# EAGLE board MotorAndLight (EAGLE 8.2.1)
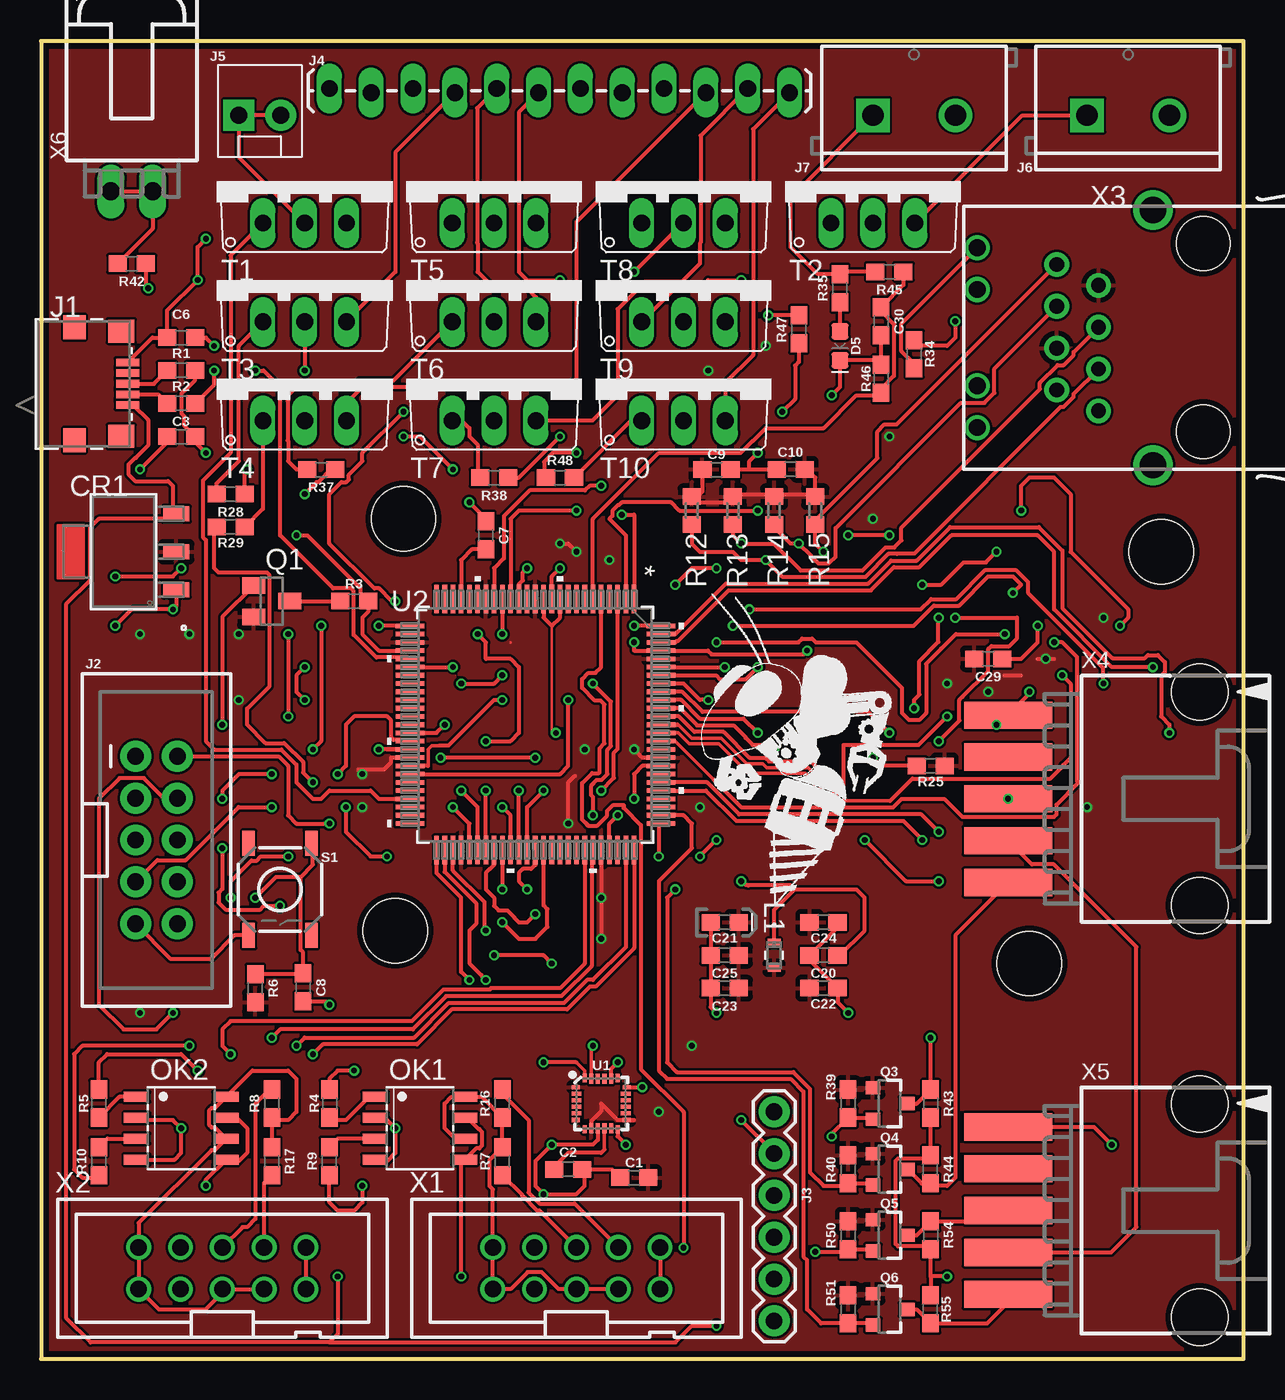
[diagram p0: board, top side]
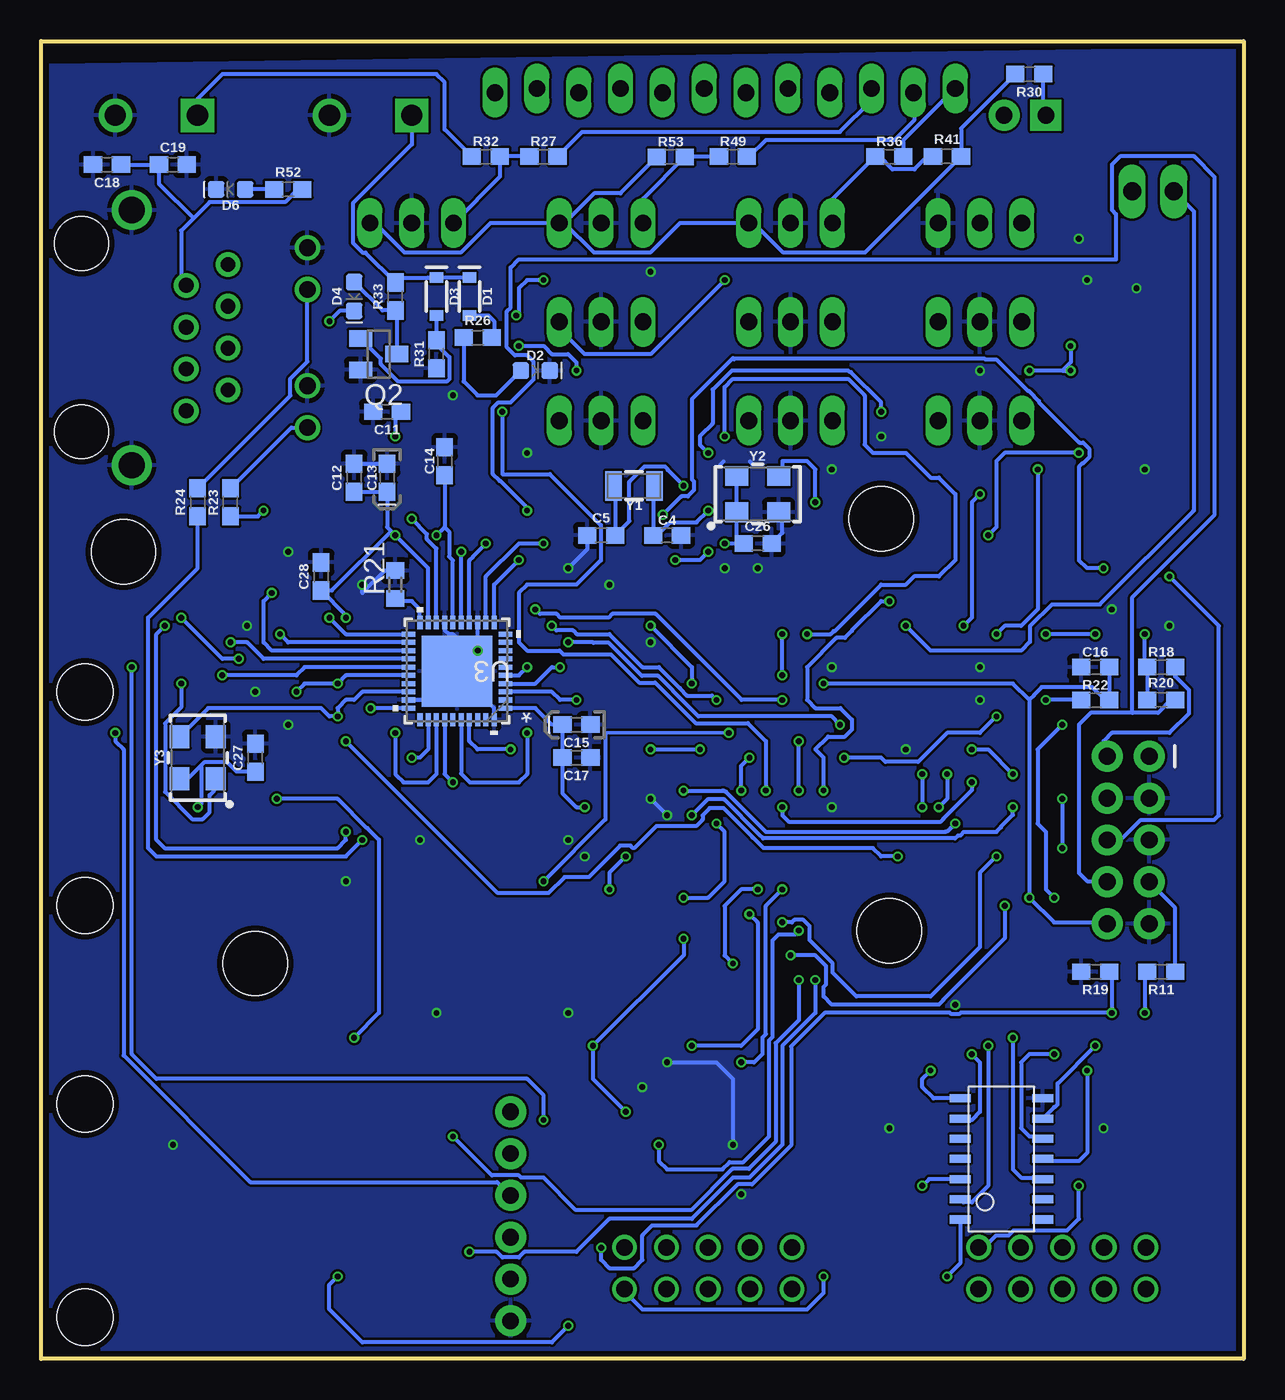
[diagram p1: board, bottom side, seen from below]

Size 73 x 80 mm. Coordinates in mm from the lower left corner, seen from the top.
Outline: 0,0 73,0 73,80 0,80 0,0
Copper layers (1*16): Top 0.018mm / dielectric 1.55mm / Bottom 0.018mm
Design rules "eC_2Layer_PClass6_BaseCopperO18_eCDefault *": minimum track width 0.15mm, minimum drill 0.35mm, track to track 0.15mm, track to pad 0.15mm, pad to pad 0.15mm, via to via 0.15mm, smd to smd 0mil, copper to edge 0.35mm, drill to drill 0.35mm, minimum pad ring 0.175mm, minimum via ring 0.125mm, stop-mask expansion 0mil, vias tented up to drill 0.45mm, thermal gap 0.3mm

## Footprints (pad centres in the part's own frame; a part is rotated, then mirrored left to right if it is on the bottom)
0603 = smd 1.1 x 1: 1 -0.85,0; 2 0.85,0
0603-POLAR = smd 1.1 x 1: + 0.85,0; - -0.85,0
SOT-223 = smd 0.914 x 1.6: 1 -2.3,-3.2; 2 0,-3.2; 3 2.3,-3.2
SOD-323 = smd 0.63 x 0.83: A 1.15,0; C -1.15,0
LED-0603 = smd 1 x 1: A -0.877,0; C 0.877,0
CONN_1981568-1 = smd 0.457 x 1.397: 1 2.6,-0.254; 2 1.95,-0.254; 3 1.3,-0.254; 4 0.65,-0.254; 5 0,-0.254 | smd 1.397 x 1.6: 6 -1.9,-0.635; 7 4.5,-0.635 | smd 1.448 x 1.346: 8 -2.129,-3.48; 9 4.729,-3.48
2X5-SHROUDED = drill 1.016 pad 1.88: 1 -1.27,5.08; 2 1.27,5.08; 3 -1.27,2.54; 4 1.27,2.54; 5 -1.27,0; 6 1.27,0; 7 -1.27,-2.54; 8 1.27,-2.54; 9 -1.27,-5.08; 10 1.27,-5.08
FTDI_BASIC = drill 1.016 pad 1.88: CTS 10.16,0; DTR 0,0; GND 12.7,0; RXI 2.54,0; TXO 5.08,0; VCC 7.62,0
1X12_LOCK_LONGPADS = drill 1.016 long: 1 0,0.127; 2 2.54,-0.127; 3 5.08,0.127; 4 7.62,-0.127; 5 10.16,0.127; 6 12.7,-0.127; 7 15.24,0.127; 8 17.78,-0.127; 9 20.32,0.127; 10 22.86,-0.127; 11 25.4,0.127; 12 27.94,-0.127
MOLEX-1X2 = drill 1.016 pad 1.88 square: 1 0,0 | drill 1.016 pad 1.88: 2 2.54,0
SCREWTERMINAL-5MM-2 = drill 1.3 pad 2.032 square: 1 0,0 | drill 1.3 pad 2.032: 2 5,0
IND_1608 = smd 0.503 x 0.8: 1 -0.752,0; 2 0.752,0
SOIC08-FAIRCHILD = smd 0.61 x 1.52: 1 -1.905,-2.723; 2 -0.635,-2.723; 3 0.635,-2.723; 4 1.905,-2.723; 5 1.905,2.723; 6 0.635,2.723; 7 -0.635,2.723; 8 -1.905,2.723
SOT23 = smd 1 x 1.4: 1 -0.95,-1.1; 2 0.95,-1.1; 3 0,1.1
SOT23-3 = smd 0.8 x 0.9: 1 -0.95,-1; 2 0.95,-1; 3 0,1.1
R0603 = smd 1 x 1.1: 1 -0.85,0; 2 0.85,0
TACTILE_SWITCH_SMD_5.2MM = smd 1.524 x 0.762: 1 -2.794,1.905; 2 2.794,1.905; 3 -2.794,-1.905; 4 2.794,-1.905
TO220V = drill 1.016 long: 1 -2.54,-2.54; 2 0,-2.54; 3 2.54,-2.54
QFN24-3X3 = smd 0.495 x 0.25: 1 -1.552,1; 6 -1.552,-1; 13 1.552,-1; 18 1.552,1 | smd 0.6 x 0.25: 2 -1.5,0.6; 3 -1.5,0.2; 4 -1.5,-0.2; 5 -1.5,-0.6; 14 1.5,-0.6; 15 1.5,-0.2; 16 1.5,0.2; 17 1.5,0.6 | smd 0.25 x 0.495: 7 -1,-1.552; 12 1,-1.552; 19 1,1.552; 24 -1,1.552 | smd 0.25 x 0.6: 8 -0.6,-1.5; 9 -0.2,-1.5; 10 0.2,-1.5; 11 0.6,-1.5; 20 0.6,1.5; 21 0.2,1.5; 22 -0.2,1.5; 23 -0.6,1.5
SOT407-1 = smd 1.727 x 0.279: 1 -7.62,6; 2 -7.62,5.5; 3 -7.62,5; 4 -7.62,4.5; 5 -7.62,4; 6 -7.62,3.5; 7 -7.62,3; 8 -7.62,2.5; 9 -7.62,2; 10 -7.62,1.5; 11 -7.62,1; 12 -7.62,0.5; 13 -7.62,0; 14 -7.62,-0.5; 15 -7.62,-1; 16 -7.62,-1.5; 17 -7.62,-2; 18 -7.62,-2.5; 19 -7.62,-3; 20 -7.62,-3.5; 21 -7.62,-4; 22 -7.62,-4.5; 23 -7.62,-5; 24 -7.62,-5.5; 25 -7.62,-6; 51 7.62,-6; 52 7.62,-5.5; 53 7.62,-5; 54 7.62,-4.5; 55 7.62,-4; 56 7.62,-3.5; 57 7.62,-3; 58 7.62,-2.5; 59 7.62,-2; 60 7.62,-1.5; 61 7.62,-1; 62 7.62,-0.5; 63 7.62,0; 64 7.62,0.5; 65 7.62,1; 66 7.62,1.5; 67 7.62,2; 68 7.62,2.5; 69 7.62,3; 70 7.62,3.5; 71 7.62,4; 72 7.62,4.5; 73 7.62,5; 74 7.62,5.5; 75 7.62,6 | smd 0.279 x 1.727: 26 -6,-7.62; 27 -5.5,-7.62; 28 -5,-7.62; 29 -4.5,-7.62; 30 -4,-7.62; 31 -3.5,-7.62; 32 -3,-7.62; 33 -2.5,-7.62; 34 -2,-7.62; 35 -1.5,-7.62; 36 -1,-7.62; 37 -0.5,-7.62; 38 0,-7.62; 39 0.5,-7.62; 40 1,-7.62; 41 1.5,-7.62; 42 2,-7.62; 43 2.5,-7.62; 44 3,-7.62; 45 3.5,-7.62; 46 4,-7.62; 47 4.5,-7.62; 48 5,-7.62; 49 5.5,-7.62; 50 6,-7.62; 76 6,7.62; 77 5.5,7.62; 78 5,7.62; 79 4.5,7.62; 80 4,7.62; 81 3.5,7.62; 82 3,7.62; 83 2.5,7.62; 84 2,7.62; 85 1.5,7.62; 86 1,7.62; 87 0.5,7.62; 88 0,7.62; 89 -0.5,7.62; 90 -1,7.62; 91 -1.5,7.62; 92 -2,7.62; 93 -2.5,7.62; 94 -3,7.62; 95 -3.5,7.62; 96 -4,7.62; 97 -4.5,7.62; 98 -5,7.62; 99 -5.5,7.62; 100 -6,7.62
SQA40B = smd 0.813 x 0.305: 1 -2.946,2.25; 2 -2.946,1.75; 3 -2.946,1.25; 4 -2.946,0.75; 5 -2.946,0.25; 6 -2.946,-0.25; 7 -2.946,-0.75; 8 -2.946,-1.25; 9 -2.946,-1.75; 10 -2.946,-2.25; 21 2.946,-2.25; 22 2.946,-1.75; 23 2.946,-1.25; 24 2.946,-0.75; 25 2.946,-0.25; 26 2.946,0.25; 27 2.946,0.75; 28 2.946,1.25; 29 2.946,1.75; 30 2.946,2.25 | smd 0.305 x 0.813: 11 -2.25,-2.946; 12 -1.75,-2.946; 13 -1.25,-2.946; 14 -0.75,-2.946; 15 -0.25,-2.946; 16 0.25,-2.946; 17 0.75,-2.946; 18 1.25,-2.946; 19 1.75,-2.946; 20 2.25,-2.946; 31 2.25,2.946; 32 1.75,2.946; 33 1.25,2.946; 34 0.75,2.946; 35 0.25,2.946; 36 -0.25,2.946; 37 -0.75,2.946; 38 -1.25,2.946; 39 -1.75,2.946; 40 -2.25,2.946 | smd 4.3 x 4.3: 41 0,0
STANDOFF-HOLE = hole 3.9: 0,0
74HC14 = smd 1.27 x 0.49: 1A -0.5,8.05; 1Y -0.5,6.825; 2A -0.5,5.6; 2Y -0.5,4.375; 3A -0.5,3.15; 3Y -0.5,1.925; 4A 4.5,6.825; 4Y 4.5,5.6; 5A 4.5,4.375; 5Y 4.5,3.15; 6A 4.5,1.925; 6Y 4.5,0.7; GND -0.5,0.7; VCC 4.5,8.05
PAK100/2500-10 = drill 1 pad 1.422: 1 -5.08,-1.27; 2 -5.08,1.27; 3 -2.54,-1.27; 4 -2.54,1.27; 5 0,-1.27; 6 0,1.27; 7 2.54,-1.27; 8 2.54,1.27; 9 5.08,-1.27; 10 5.08,1.27
SI-50170 = drill 0.9 pad 1.5: 1 4.445,5.842; 2 3.175,3.302; 3 1.905,5.842; 4 0.635,3.302; 5 -0.635,5.842; 6 -1.905,3.302; 7 -3.175,5.842; 8 -4.445,3.302 | drill 1.016 pad 1.5: A1 -5.461,10.668; A2 2.921,10.668; C1 -2.921,10.668; C2 5.461,10.668 | drill 1.6 pad 2.2: S1 -7.747,0; S2 7.747,0 | hole 3.251: -5.715,-3.048; 5.715,-3.048
15-91-05 = smd 1.651 x 5.334: 1 -5.08,-10.795; 2 -2.54,-10.795; 3 0,-10.795; 4 2.54,-10.795; 5 5.08,-10.795 | hole 3.404: -6.477,0.838; 6.477,0.838
70553-02 = drill 1.092 long: 1 -1.27,-7.62; 2 1.27,-7.62
CRYSTAL-SMD-3.2X1.5MM = smd 1 x 1.8: P$1 -1.25,0; P$2 1.25,0
OSCILLATOR-SMD-5X3.2 = smd 1.397 x 1.194: 1 -1.27,-1.1; 2 1.27,-1.1; 3 1.27,1.1; 4 -1.27,1.1

## Placement (x,y rotation side)
C1  0.1uF  [0603]  36,11 180 top
C2  0.1uF  [0603]  32,11.5 0 top
C3  18pF  [0603]  8.5,56 180 top
C4  18pF  [0603]  35,50 180 bottom
C5  18pF  [0603]  39,50 0 bottom
C6  18pF  [0603]  8.5,62 180 top
C7  100pF  [0603]  27,50 270 top
C8  1000pF  [0603]  15.9,22.55 270 top
C9  0.1uF  [0603]  41,54 180 top
C10  0.1uF  [0603]  45.5,54 0 top
C11  0.1uF  [0603]  52,57.5 180 bottom
C12  0.1uF  [0603]  54,53.5 90 bottom
C13  10uF  [0603-POLAR]  52,53.5 270 bottom
C14  0.1uF  [0603]  48.5,54.5 270 bottom
C15  10uF  [0603-POLAR]  40.5,38.5 180 bottom
C16  0.1uF  [0603]  9,42 180 bottom
C17  0.1uF  [0603]  40.5,36.5 180 bottom
C18  0.1uF  [0603]  69,72.5 180 bottom
C19  0.1uF  [0603]  65,72.5 0 bottom
C20  0.1uF  [0603]  47.5,24.5 180 top
C21  10uF  [0603-POLAR]  41.5,26.5 0 top
C22  0.1uF  [0603]  47.5,22.5 0 top
C23  0.1uF  [0603]  41.5,22.5 180 top
C24  0.1uF  [0603]  47.5,26.5 0 top
C25  0.1uF  [0603]  41.5,24.5 180 top
C26  0.1uF  [0603]  29.5,49.5 0 bottom
C27  0.1uF  [0603]  60,36.5 90 bottom
C28  0.1uF  [0603]  56,47.5 90 bottom
C29  0.1uF  [0603]  57.5,42.5 180 top
C30  0.1uF  [0603]  51,63 270 top
CR1  LD1117S33TR  [SOT-223]  5,49 90 top
D1  3.3V  [SOD-323]  47,64.5 270 bottom
D2  RED  [LED-0603]  43,60 0 bottom
D3  3.3V  [SOD-323]  49,64.5 270 bottom
D4  GREEN  [LED-0603]  54,64.5 270 bottom
D5  BLUE  [LED-0603]  48.5,61.5 270 top
D6  WHITE  [LED-0603]  61.5,71 180 bottom
J1  1981568-1  [CONN_1981568-1]  5.5,60.5 270 top
J2  Programming Port  [2X5-SHROUDED]  7,31.5 0 top
J3  6_PIN_SERIAL_CABLEPTH  [FTDI_BASIC]  44.5,15 270 top
J4  Under Glow  [1X12_LOCK_LONGPADS]  17.5,77 0 top
J5  Safety Light  [MOLEX-1X2]  12,75.5 0 top
J6  12V  [SCREWTERMINAL-5MM-2]  63.5,75.5 0 top
J7  24V  [SCREWTERMINAL-5MM-2]  50.5,75.5 0 top
L1  10uH  [IND_1608]  44.5,24.5 270 top
OK1  MOCD208M  [SOIC08-FAIRCHILD]  23,14 270 top
OK2  MOCD208M  [SOIC08-FAIRCHILD]  8.5,14 270 top
Q1  BSS84  [SOT23]  14,46 270 top
Q2  BC846ASMD  [SOT23]  52.5,61 270 bottom
Q3  220mA/50V/3.5Ω  [SOT23-3]  51.5,15.5 270 top
Q4  220mA/50V/3.5Ω  [SOT23-3]  51.5,11.5 270 top
Q5  220mA/50V/3.5Ω  [SOT23-3]  51.5,7.5 270 top
Q6  220mA/50V/3.5Ω  [SOT23-3]  51.5,3 270 top
R1  33  [0603]  8.5,60 0 top
R2  33  [0603]  8.5,58 0 top
R3  1.5k  [0603]  19,46 0 top
R4  1k  [0603]  17.5,15.5 270 top
R5  1k  [0603]  3.5,15.5 270 top
R6  47k  [0603]  13,22.5 270 top
R7  10k  [0603]  28,12 90 top
R8  10k  [0603]  14,15.5 90 top
R9  1k  [0603]  17.5,12 90 top
R10  1k  [0603]  3.5,12 90 top
R11  10k  [0603]  5,23.5 180 bottom
R12  49.9  [R0603]  39.5,51.5 270 top
R13  49.9  [R0603]  42,51.5 90 top
R14  49.9  [R0603]  44.5,51.5 270 top
R15  49.9  [R0603]  47,51.5 90 top
R16  10k  [0603]  28,15.5 90 top
R17  10k  [0603]  14,12 270 top
R18  10k  [0603]  5,42 180 bottom
R19  10k  [0603]  9,23.5 180 bottom
R20  10k  [0603]  5,40 0 bottom
R21  4.87k  [R0603]  51.5,47 90 bottom
R22  100k  [0603]  9,40 180 bottom
R23  150  [0603]  61.5,52 90 bottom
R24  150  [0603]  63.5,52 90 bottom
R25  2.2k  [0603]  54,36 0 top
R26  2700  [0603]  46.5,62 0 bottom
R27  2700  [0603]  42.5,73 180 bottom
R28  200  [0603]  11.5,52.5 180 top
R29  200  [0603]  11.5,50.5 0 top
R30  2700  [0603]  13,78 180 bottom
R31  200  [0603]  49,61 90 bottom
R32  200  [0603]  46,73 180 bottom
R33  2700  [0603]  51.5,64.5 90 bottom
R34  200  [0603]  53,61 90 top
R35  2700  [0603]  48.5,65 90 top
R36  2700  [0603]  21.5,73 180 bottom
R37  200  [0603]  17,54 180 top
R38  200  [0603]  27.5,53.5 180 top
R39  10k  [0603]  49,15.5 90 top
R40  10k  [0603]  49,11.5 90 top
R41  200  [0603]  18,73 0 bottom
R42  2700  [0603]  5.5,66.5 180 top
R43  10k  [0603]  54,15.5 270 top
R44  10k  [0603]  54,11.5 90 top
R45  2700  [0603]  51.5,66 180 top
R46  536  [0603]  51,59.5 270 top
R47  200  [0603]  46,62.5 90 top
R48  200  [0603]  31.5,53.5 0 top
R49  2700  [0603]  31,73 180 bottom
R50  10k  [0603]  49,7.5 90 top
R51  10k  [0603]  49,3 90 top
R52  2700  [0603]  58,71 0 bottom
R53  200  [0603]  34.77,72.98 180 bottom
R54  10k  [0603]  54,7.5 270 top
R55  10k  [0603]  54,3 90 top
S1  Momentary Switch 5.2mm  [TACTILE_SWITCH_SMD_5.2MM]  14.5,28.5 270 top
T1  TIP41A  [TO220V]  16,71.5 0 top
T2  TIP41A  [TO220V]  50.5,71.5 0 top
T3  TIP41A  [TO220V]  16,65.5 0 top
T4  TIP41A  [TO220V]  16,59.5 0 top
T5  TIP41A  [TO220V]  27.5,71.5 0 top
T6  TIP41A  [TO220V]  27.5,65.5 0 top
T7  TIP41A  [TO220V]  27.5,59.5 0 top
T8  TIP41A  [TO220V]  39,71.5 0 top
T9  TIP41A  [TO220V]  39,65.5 0 top
T10  TIP41A  [TO220V]  39,59.5 0 top
U1  9DoF IMU  [QFN24-3X3]  34,15.5 0 top
U2  LPC1768FBD100  [SOT407-1]  30,38.5 270 top
U3  DP83848JSQ/NOPB  [SQA40B]  47.75,41.75 180 bottom
U$3  [STANDOFF-HOLE]  21.5,26 0 top
U$4  [STANDOFF-HOLE]  68,49 0 top
U$5  [STANDOFF-HOLE]  22,51 0 top
U$6  [STANDOFF-HOLE]  60,24 0 top
U$13  [ROBOBUZZ_1.0X]  44.5,27.5 0 top
U$14  ICHEXINV  [74HC14]  12.7,16.51 180 bottom
X1  2510-  [PAK100/2500-10]  32.5,5.5 0 top
X2  2510-  [PAK100/2500-10]  11,5.5 0 top
X3  SI-50170  [SI-50170]  67.5,62 90 top
X4  C-GRID-05-15-91  [15-91-05]  69.5,34 270 top
X5  C-GRID-05-15-91  [15-91-05]  69.5,9 270 top
X6  C-GRID-02-70553  [70553-02]  5.5,78.5 0 top
Y1  32.768kHz  [CRYSTAL-SMD-3.2X1.5MM]  37,53 0 bottom
Y2  OSCILLATORSMD-5X3-12MHz  [OSCILLATOR-SMD-5X3.2]  29.5,52.5 0 bottom
Y3  OSCILLATORSMD-5X3-50MHz  [OSCILLATOR-SMD-5X3.2]  63.5,36.5 90 bottom

## Library data of the parts
C1 C2 C16-C20 C22-C25 C30 = SparkFun-Capacitors; PROD_ID: CAP-00810
C3-C6 = SparkFun-Capacitors; PROD_ID: CAP-08267
C7 = SparkFun-Capacitors; PROD_ID: CAP-07883
C8 = SparkFun-Capacitors; PROD_ID: CAP-07886
C9-C12 C14 C26-C29 = SparkFun-Capacitors; PROD_ID: CAP-08604
C13 C15 C21 = SparkFun-Capacitors; PROD_ID: CAP-13210
CR1 = LD1117; MANUFACTURER_PART_NUMBER: LD1117S33TR; VENDOR: ST Microelectronics
D1 D3 = SparkFun-DiscreteSemi; PROD_ID: DIO-11284
D2 D4-D6 = SparkFun-LED
J1 = DigiKey; MANUFACTURER_PART_NUMBER: 19815681; VENDOR: Tyco Electronics
J2 = SparkFun-Connectors; PROD_ID: CONN-08671; SF_ID: PRT-08506
J3 J4 = SparkFun-Connectors
J5 = SparkFun-Retired; SF_ID: PRT-09918
J6 J7 = SparkFun-Connectors; SF_SKU: PRT-08432
L1 = DigiKey; MANUFACTURER_PART_NUMBER: MLZ1608N100LT000; VENDOR: TDK
OK1 OK2 = optocoupler; MF: FAIRCHILD SEMICONDUCTOR; MPN: MOCD208M; OC_FARNELL: 1505465; OC_NEWARK: 34C7498
Q1 = transistor-small-signal
Q2 = transistor-npn
Q3-Q6 = SparkFun-DiscreteSemi; PROD_ID: TRANS-00830
R1 R2 = SparkFun-Resistors; PROD_ID: RES-08270
R3 = SparkFun-Resistors; PROD_ID: RES-08306
R4 R5 R9 R10 = SparkFun-Resistors; PROD_ID: RES-07856
R6 = SparkFun-Resistors; PROD_ID: RES-07871
R7 R8 R11 R16-R20 R39 R40 R43 R44 R50 R51 R54 R55 = SparkFun-Resistors; PROD_ID: RES-00824
R12-R15 R21 = rcl
R22 = SparkFun-Resistors; PROD_ID: RES-07828
R23 R24 = SparkFun-Resistors; PROD_ID: RES-11028
R25 = SparkFun-Resistors; PROD_ID: RES-08272
R26 R30 R33 R35 R42 R45 R46 R52 = SparkFun-Resistors; PROD_ID: RES-08701
R27 R36 R49 = SparkFun-Resistors; PROD_ID: RES-11227
R28 R29 R31 R32 R34 R37 R38 R41 R47 R48 R53 = SparkFun-Resistors; PROD_ID: RES-08220
S1 = SparkFun-Switches; PROD_ID: SWCH-08247; SF_SKU: COM-08720
T1-T10 = transistor
U1 = SparkFun-Sensors; PROD_ID: IC-13192
U2 = DigiKey; MANUFACTURER_PART_NUMBER: lpc1768fbd100; VENDOR: NXP
U3 = DigiKey; MANUFACTURER_PART_NUMBER: dp83848jsqnopb; VENDOR: National Semiconductor
U$3-U$6 = temp
U$13 = RoboJackets-Aesthetics
U$14 = DigiKey
X1 X2 = con-3m; MF: 3M; MPN: 2510-6002UB; OC_FARNELL: 9838244; OC_NEWARK: 46F4725
X3 = con-stewart; OC_FARNELL: unknown; OC_NEWARK: unknown
X4-X6 = con-molex; OC_FARNELL: unknown; OC_NEWARK: unknown
Y1 = SparkFun-Clocks; PROD_ID: XTAL-13062
Y2 Y3 = SparkFun-Clocks

## Nets
1S1: R28.1 U2.62
1S1O: J4.4 T3.3
1S2: R37.1 U2.63
1S2O: J4.5 T6.3
1S3: R47.1 U2.61
1S3O: J4.6 T9.3
2S1: R29.1 U2.60
2S1O: J4.10 T4.3
2S2: R38.1 U2.57
2S2O: J4.11 T7.3
2S3: R48.1 U2.56
2S3O: J4.12 T10.3
12MHZ: C7.1 Y2.3
50MHZ: U2.88 U3.28 Y3.3
!LDIR!: R9.1 U$14.4Y
!LSPEED!: R4.1 U$14.6Y
!RDIR!: R10.1 U$14.3Y
!RSPEED!: R5.1 U$14.2Y
+3V3: C1.1 C9.2 C10.2 C11.1 C15.+ C17.2 C18.1 C19.1 C21.+ C22.1 C23.1 C24.1 C25.1 C26.1 C27.1 C29.2 CR1.2 L1.2 Q1.2 Q3.1 Q4.1 Q5.1 Q6.1 R6.2 R11.2 R12.1 R13.2 R14.1 R15.2 R18.2 R20.1 R22.2 R25.2 R39.2 R40.2 R50.2 R51.2 R52.2 U1.1 U1.8 U1.13 U2.13 U2.19 U2.28 U2.42 U2.54 U2.71 U2.84 U2.96 U3.1 U3.18 U3.26 X3.2 X3.5 Y2.1 Y2.4 Y3.4
+5V: CR1.3 J1.1 R43.2 R44.2 R54.2 R55.2 U$14.VCC
+12V: J6.1 R30.2 R32.2 R41.2 R53.2 T2.3 T5.3 T8.3
+24V: D1.C D3.C J7.1 R33.2 R35.2 R45.2
BATTIN: C30.1 R45.1 R46.2 U2.6
BLUE: J4.1 R36.1
ESTOP: R42.2 U2.26 X6.1 X6.2
ETH_LED1: R23.2 X3.A1
ETH_LED2: R24.2 X3.A2
ETH_OSC_EN: U2.43 Y3.1
ETH_RST: U2.44 U3.23
GND: C1.2 C2.2 C3.2 C4.1 C5.1 C6.2 C8.2 C9.1 C10.1 C11.2 C12.2 C13.- C14.1 C15.- C16.2 C17.1 C18.2 C19.2 C20.2 C21.- C22.2 C23.2 C24.2 C25.2 C26.2 C27.2 C28.2 C29.1 C30.2 CR1.1 D2.C D5.C D6.C J1.5 J2.3 J2.5 J2.9 J3.GND J6.2 J7.2 OK1.2 OK1.4 OK2.2 OK2.4 Q2.2 R19.2 R21.2 R31.1 R34.1 R42.1 R46.1 S1.4 T1.3 T2.2 T3.2 T4.2 T5.2 T6.2 T7.2 T8.2 T9.2 T10.2 U1.9 U1.18 U1.20 U2.11 U2.15 U2.31 U2.41 U2.55 U2.72 U2.83 U2.97 U3.13 U3.17 U3.29 U3.40 U3.41 U$14.GND X3.C1 X3.C2 X3.S1 X3.S2 X4.1 X5.1 Y2.2 Y3.2
GREEN: J4.2 R49.1
GYRO_INT: U1.12 U2.53
L+12V: OK1.6 OK1.8 R7.2 R16.1 X1.1 X1.2 X1.5 X1.7
LALI: R7.1 X1.6
LBLI: R16.2 X1.8
LDIR: U2.74 U$14.4A
LDISABLE: U2.73
LEA: Q3.3 R43.1 X4.3
LEA3: Q3.2 R39.1 U2.52
LEB: Q4.3 R44.1 X4.5
LEB3: Q4.2 R40.1 U2.76
LED_LINK: U2.39 U3.22
LED_SPEED: U2.40 U3.21
LGND: OK1.5 OK1.7 X1.9 X1.10
LPC_D+: J1.3 R1.1
LPC_D-: J1.2 R2.1
LSPEED: U2.75 U$14.6A
N$1: OK1.1 R4.2
N$2: C4.2 U2.16 Y1.P$2
N$3: C5.2 U2.18 Y1.P$1
N$4: Q1.3 R3.1
N$6: OK2.1 R5.2
N$7: OK2.3 R10.2
N$9: OK1.3 R9.2
N$10: C7.2 U2.22
N$11: R23.1 U2.81
N$13: C2.1 U1.10
N$14: R21.1 U3.20
N$15: R24.1 U2.80
N$16: R25.1 U3.32
N$24: J5.1 J5.2 R30.1 T1.2
N$34: R27.2 R32.1 T2.1
N$36: R36.2 R41.1 T5.1
N$38: R49.2 R53.1 T8.1
N$40: R47.2 T9.1
N$41: R37.2 T6.1
N$42: R28.2 T3.1
N$43: R29.2 T4.1
N$44: R38.2 T7.1
N$45: R48.2 T10.1
N$46: D1.A R26.2
N$47: D2.A R26.1
N$48: D4.C R34.2
N$49: D3.A Q2.1 R31.2
N$50: D5.A R35.1
N$51: D4.A Q2.3 R33.1
N$54: D6.A R52.1
NRESET: C8.1 C16.1 J2.10 R6.1 R22.1 S1.1 U2.17
PFBOUT: C12.1 C13.+ C14.2 C28.1 U3.16 U3.19 U3.30
R+12V: OK2.6 OK2.8 R8.1 R17.1 X2.1 X2.2 X2.5 X2.7
RALI: R8.2 X2.6
RBLI: R17.2 X2.8
RD+: R13.1 U3.12 X3.4
RD-: R12.2 U3.11 X3.6
RDIR: U2.69 U$14.3A
RDISABLE: U2.68
REA: Q5.3 R54.1 X5.3
REA3: Q5.2 R50.1 U2.51
REB: Q6.3 R55.1 X5.5
REB3: Q6.2 R51.1 U2.77
RED: J4.3 R27.1
RGND: OK2.5 OK2.7 X2.9 X2.10
RSPEED: U2.70 U$14.2A
RTCK: J2.7 R11.1 U2.100
SCL: U1.23 U2.58
SDA: U1.24 U2.59
SLIGHT: T1.1 U2.47
TCLK: J2.4 R19.1 U2.5
TD+: R15.1 U3.15 X3.1
TD-: R14.2 U3.14 X3.3
TDI: J2.8 R20.2 U2.2
TDO: J2.6 U2.1
TGT_P1.0: U2.95 U3.4
TGT_P1.1: U2.94 U3.5
TGT_P1.4: U2.93 U3.3
TGT_P1.8: U2.92 U3.33
TGT_P1.9: U2.91 U3.36
TGT_P1.10: U2.90 U3.37
TGT_P1.14: U2.89 U3.34
TGT_P1.16: U2.87 U3.25
TGT_P1.17: U2.86 U3.24
TGT_RXD: J3.TXO U2.99
TGT_SCON: Q1.1 U2.64
TGT_TXD: J3.RXI U2.98
TMS: J2.2 R18.1 U2.3
USB_D+: C3.1 R1.2 R3.2 U2.29
USB_D-: C6.1 R2.2 U2.30
VCC: X4.4 X5.4
VDDA: C20.1 L1.1 U2.10 U2.12

## Tracks (layer width: path | path; a pad name or v marks a point on that pad's centre or on a via)
1S1  (via drill 0.35)
  Top 0.254: R28.1 12.35,53.85 v12.5,54 | v15,44 v15,39 | U2.62 29.5,33.5 v30.5,34.5 | v30,36.5 v24.25,36.5
  Bottom 0.254: v12.5,54 12.5,45.5 13.5,44.5 14.5,44.5 v15,44 | v30.5,34.5 30.5,36 v30,36.5 | v24.25,36.5 22,36.5 21.75,36.25 19.75,36.25 | v15,39 16,38 18,38 19.75,36.25 | 19.75,36.25 19.77,36.23
1S1O
  Top 0.254: J4.4 21.5,73.25 21.5,66 18.54,63.04 T3.3
1S2  (via drill 0.35)
  Top 0.254: U2.63 30,29.98 29.75,29.74 29.24,29.74 29,29.5 29,29 v29.5,28.5 | v31,24 30.5,24.5 v27.5,24.5 | v17,44.5 17,37.5 v16.5,37 | v14,35.5 12,35.5 11,34.5 v11,34 | v11,31 11,28.53 10.77,28.3 10.77,27.7 11.2,27.27 13.3,27.27 13.53,27.5 v14.5,27.5 | v16,52.5 16.72,53.22 16.82,53.22 17.59,54 R37.1
  Bottom 0.254: v29.5,28.5 30.5,28.5 31.5,27.5 31.5,24.5 v31,24 | v27.5,24.5 26,24.5 25.35,23.85 25.35,22.73 25.5,22.58 25.5,22 25,21.5 18.5,21.5 18.23,21.77 18.23,21.8 14.5,25.53 v14.5,27.5 | v17,44.5 16.5,45 16.5,52 v16,52.5 | v16.5,37 15.5,37 v14,35.5 | v11,34 v11,31
1S2O
  Top 0.254: J4.5 26.46,75.93 26.46,67.77 26.5,67.73 26.5,66 27.5,65 29.5,65 30.04,64.46 T6.3
1S3  (via drill 0.35)
  Top 0.254: R47.1 46,60.53 45.77,60.3 45.77,58.27 v45,57.5 | U2.61 v29,34.5
  Bottom 0.254: v45,57.5 45,53.71 42.12,53.71 39.02,50.62 39.02,48.48 40.5,47 43.5,47 44,46.5 44,43.5 43.5,43 41.53,43 41.3,42.77 39.5,42.77 39.34,42.77 38.42,42.77 36.7,41.06 35.73,41.06 33.27,38.6 30.1,38.6 29,37.5 v29,34.5
1S3O  (via drill 0.35)
  Top 0.254: J4.6 29,75.67 29,66 29.5,65.5 v31.5,65.5
  Bottom 0.254: v31.5,65.5 36,61 40,61 41.54,62.54 T9.3
2S1  (via drill 0.35)
  Top 0.254: U2.60 28.5,33 v28,33.5 | v16.5,35 15.9,35.6 15.9,36.24 14.76,37.39 13.61,37.39 12.5,38.5 12.5,39.47 13.88,40.85 13.88,47.56 13.71,47.73 10.77,47.73 10.5,48 10.5,50.35 R29.1
  Bottom 0.254: v28,33.5 28,33 27.58,32.58 18.42,32.58 18.23,32.77 18.23,32.8 16.5,34.53 v16.5,35
2S1O
  Top 0.254: J4.10 32.5,69.01 32.5,59.5 32,59 19.5,59 18.54,58.04 T4.3
2S2  (via drill 0.35)
  Top 0.254: R38.1 29,53.5 v31.5,56 | U2.57 v27,34.5 | v27,37.5 28.5,37.5 29,38 29,42 28.5,42.5 27,42.5 27,43.5 v26.5,44
  Bottom 0.254: v31.5,56 31.5,59 31,59.5 24,59.5 23,58.5 23,55.5 22.5,55 20.5,55 19,53.5 18.5,53.5 17.5,52.5 17.5,48.5 18.5,47.5 20,47.5 20.5,47 22,47 24.82,44.18 24.89,44.18 25.07,44 v26.5,44 | v27,34.5 v27,37.5
2S2O
  Top 0.254: J4.11 40.04,74.27 40.04,67.77 40,67.73 40,66.5 38.9,65.4 36.67,65.4 35,63.73 35,58.5 33.46,56.96 T7.3
2S3  (via drill 0.35)
  Top 0.254: U2.56 26.5,33.5 v25.5,34.5 | v21.5,46 21.29,46 20.52,46.78 20.22,46.78 17.5,49.5 17.5,52.5 18.22,53.22 18.52,53.22 18.68,53.38 18.68,53.68 19.5,54.5 19.5,55 v22,57.5 | v32.5,55 31.07,55 30.54,54.46 30.54,53.61 R48.1
  Bottom 0.254: v25.5,34.5 25.5,36.5 26,37 25.23,37.77 24.2,37.77 23.77,38.2 23.77,38.8 24.47,39.5 26,39.5 26.5,40 26.5,42 24.73,43.77 24.2,43.77 23.77,44.2 23.77,44.23 22,46 v21.5,46 | v22,57.5 22,58.07 23.83,59.9 23.9,59.9 24,60 31.07,60 32.23,58.84 32.23,56.77 33,56 33,55.5 v32.5,55
2S3O
  Top 0.254: T10.3 41.54,59.25 43.23,60.94 43.23,74.66 J4.12
12MHZ  (via drill 0.35)
  Top 0.254: C7.1 27,51 v26,52
  Bottom 0.254: v26,52 26,54 26.5,54.5 28,54.5 28,53.83 Y2.3
50MHZ  (via drill 0.35)
  Top 0.2: 38.5,38.5 38.68,38.5 39.5,37.68 41.28,37.68 42.84,36.12 43.82,36.12 44.04,35.9 46.57,35.9 47.3,35.17 47.3,34.71 47.71,34.3 48.27,34.3 48.3,34.27
  Top 0.254: 48.3,34.27 48.73,34.7 48.73,37.27 53.27,37.27 v55,39 | U2.88 38.5,38.5 38.64,38.5
  Bottom 0.254: Y3.3 62.87,39.5 56,39.5 55.5,39 v55,39 55,39.5 54.5,40 54,40 53.5,40.5 U3.28
!LDIR!  (via drill 0.35)
  Top 0.254: v19.5,10.5 19.5,9.5 19,9 18,9 17.5,9.5 R9.1
  Bottom 0.254: U$14.4Y 19.09,10.91 v19.5,10.5
!LSPEED!  (via drill 0.35)
  Top 0.254: v19,17.5 18,17.5 17.5,17 R4.1
  Bottom 0.254: U$14.6Y 18.81,15.81 19.5,16.5 19.5,17 v19,17.5
!RDIR!  (via drill 0.35)
  Top 0.254: v9,19 2.5,19 2,18.5 2,11.5 2.5,11 3.35,11 R10.1
  Bottom 0.254: U$14.3Y 11.5,15.29 11.45,15.29 11.29,15.45 11.29,15.5 11.29,16.71 v9,19
!RSPEED!  (via drill 0.35)
  Top 0.254: R5.1 3.5,18 4,18.5 8.5,18.5 v9.5,17.5
  Bottom 0.254: v9.5,17.5 9.5,12.5 10,12 12.06,12 U$14.2Y
+3V3  (via drill 0.35)
  Top 0.15: 28.5,43.5 28.51,43.49 | 27,45.5 U2.19
  Top 0.2: U1.8 33.4,14.41
  Top 0.25: 36,14.5 U1.13 35,14.5 34,15.5
  Top 0.254: C9.2 40.15,52.65 39.5,52 41.5,52 42,52.5 47,52.5 47,53.5 46.5,54 | v31.5,49.5 32,49.5 v32.5,49 | U2.42 21.23,36.5 21.23,36.2 20.8,35.77 19.27,35.77 19.27,35.73 v19.5,35.5 | 58.5,41.5 59.5,41.5 | 60.5,42.5 v61,42.5 61.5,42.5 | U2.71 v34,28 v34,25.5 | v32,32.5 32,35 32.4,35.4 | U2.84 36.5,36.5 v36,37 | 33.4,14.41 33.4,14.31 | 34,15.5 34,15.02 33.4,14.41 | 33.4,14.41 | 36,14.5 35.92,14.5 35.91,14.5 U1.13
  Bottom 0.254: Y2.4 Y2.1 30.77,49.92 C26.1 v31.5,49.5 | Y3.4 64.09,35.23 63.27,36.04 | R11.2 6,23.5 v6,21 | R22.2 v12,40 | R20.1 R18.2 6,42 v6,44 | C11.1 51.5,57.15 v51.5,56 | 63.27,36.04 63.11,36.21 61.69,36.21 61.13,35.65 C27.1 | 63.27,36.04 63.27,33.73 v63.5,33.5 | v40,33.5 40.5,33.5 41.35,34.35 C17.2 C15.+ 42,38.5 43,39.5 U3.1 | 63.75,69.25 62.78,70.22 58.19,70.22 57.41,71 R52.2 | 63.75,69.25 64.5,68.5 64.5,65.48 X3.2 | 65.85,72 C19.1 | 65.85,72 65.85,71.35 63.75,69.25 | C18.1 66.35,72.5 65.85,72 | v9,44 v12,44 | v61,42.5 62,42.5 v64.5,45 | v34,25.5 34,24.5 v39.5,19 39.5,17 v37.5,15 | v19.5,35.5 v19.5,33.5 | v34,28 32.5,28 31.5,29 31.5,32 v32,32.5 | v36,37 v33,37 | v44,61.5 42.5,61.5 42,61 41,61 40.5,60.5 v40.5,60 | U3.26 54.5,41.5 v55,41 57,41 v57.5,40.5 | v32.5,49 33,48.5 v34.5,48.5 | v50.5,51 49.58,50.08 49.58,49.76 49,49.18 U3.18
  pour Top: 0.5,79.5 72.5,79.5 72.5,0.5 0.5,0.5
+5V  (via drill 0.35)
  Top 0.254: R43.2 R44.2 53.83,12.18 52.03,12.18 51.87,12.02 51.87,6.99 52.03,6.82 53.83,6.82 R54.2 54,5 | 54,5 R55.2 | v55,5 54,5 | 17.5,1 3,1 1.5,2.5 1.5,45.8 2.95,47.25 2.95,50.45 3.5,51 7.9,51 CR1.3 8,51.5 8,53 7.71,53.29 5.71,53.29 5.29,53.71 5.29,54.29 5.71,54.71 5.75,54.71 6.5,55.46 6.5,57 5.6,57.9 J1.1 | 17.5,1 38.5,1 39.5,2 v41,2 | v18,5 18,1.5 17.5,1
  Bottom 0.254: v55,5 55.5,4.5 55.5,3 53.5,1 42,1 v41,2 | U$14.VCC 17.2,5.8 v18,5
+12V
  Top 0.254: 41.23,68.96 T8.3 | T2.3 59.58,75.5 J6.1
  Bottom 0.254: 41.23,68.96 39.43,67.16 36.03,67.16 34.23,68.96 T5.3 29.73,68.96 27.93,67.16 22.99,67.16 R41.2 17.15,74.7 R30.2 | R53.2 37.84,70.76 39.43,70.76 41.23,68.96 | 41.23,68.96 T8.3 45.73,68.96 47.53,67.16 50.93,67.16 52.64,68.86 52.73,68.96 T2.3 | R32.2 48.5,74.65 48.5,77.5 49,78 62,78 63.5,76.5 J6.1
+24V
  Top 0.254: R45.2 48.65,66 R35.2 47.15,65.85 45.5,67.5 45.5,70.5 J7.1
  Bottom 0.254: D3.C 49.5,65.65 | D3.C 51.5,65.65 R33.2 53.31,67.16 53.47,67.16 54.08,67.77 54.08,70.15 50.5,73.73 J7.1 | D1.C D3.C
BATTIN
  Top 0.254: R45.1 52.35,65.2 C30.1 51,63.59 51.78,62.81 51.78,59.69 51,58.91 R46.2 50.85,58.5 49.5,58.5 47.5,56.5 44,56.5 43.23,55.73 43.2,55.73 42.47,55 37.5,55 33.5,51 U2.6
BLUE
  Bottom 0.254: J4.1 20.65,73.98 R36.1
ESTOP  (via drill 0.35)
  Top 0.254: U2.26 v20.5,44.5 | X6.1 X6.2 6.77,68.62 R42.2
  Bottom 0.254: v20.5,44.5 19,43 13.5,43 12.96,43.54 12.96,44.46 11.63,45.8 8.73,45.8 3.03,51.5 3,51.5 3,69.65 X6.1
ETH_LED1
  Bottom 0.254: R23.2 57.81,56.54 X3.A1
ETH_LED2
  Bottom 0.254: R24.2 57.87,58.48 57.87,59.51 56.83,60.55 X3.A2
ETH_OSC_EN  (via drill 0.35)
  Top 0.2: 24.2,37.23 23.73,37.23 23.5,37 23.5,36
  Top 0.254: 23.5,36 U2.43 | 24.2,37.23 24.73,37.23 27.5,40 v28,40 | v43,45.5 53.4,45.5 54.03,46.13 55.56,46.13 57.33,47.9 59.17,47.9 59.9,47.17 59.9,46.52 64.46,41.96 64.46,41.04 v64.5,41
  Bottom 0.254: v28,40 30.47,40 35.7,45.23 38.32,45.23 38.55,45 41.47,45 41.7,45.23 42.73,45.23 v43,45.5 | v64.5,41 64.5,39.56 65.47,38.58 65.47,34.42 63.83,32.77 63.2,32.77 62.77,33.2 62.77,34.23 62.5,34.5 62.5,35.13 Y3.1
ETH_RST  (via drill 0.35)
  Top 0.254: v59,46.5 59.5,47 59,47.5 57.5,47.5 55.73,45.73 54.2,45.73 52.97,44.5 v42,44.5 | v32,40 32,36 31.5,35.5 U2.44
  Bottom 0.254: v42,44.5 41.73,44.23 40.7,44.23 40.47,44 38.5,44 36.5,42 35.5,42 34.23,40.73 34.23,40.7 33.8,40.27 32.27,40.27 v32,40 | v59,46.5 59.5,46 59.5,43.5 59,43 U3.23
GND  (via drill 0.35)
  Top 0.15: 29.25,47.25 29.24,47.26
  Top 0.25: OK2.4 8.1,12.1 8.5,12.5 v8.5,14 8,14.5 5.91,14.5 OK2.2 | U1.18 v36.5,16.5 | U1.9 33.8,13.3 33.5,13 v31,13 30,12 30,10.5 v30.5,10 32.5,10 33,10.5 33,11.35 C2.2 34.65,11.5 C1.2 | U1.20 34.6,17.6
  Top 0.254: CR1.1 8.2,45.7 v8,45.5 5.5,45.5 v4.5,44.5 | X5.1 63.92,14.08 v65,13 | C9.1 43,54 | 43,54 C10.1 | 43,54 43,54.5 v43.5,55 | 16.2,21.7 C8.2 17.3,21.7 v17.5,21.5 | S1.4 11.73,25.71 10.3,24.27 7.88,24.27 J2.9 | v53.5,47 54.65,47 C28.2 57.35,48.35 v58,49 | v60,40.5 60,40.38 X4.1 58.58,39.08 v58,38.5 | C30.2 R46.1 50.73,60.62 D5.C 48.5,59 v48,58.5 | R34.1 53,60.41 52.22,61.19 52.22,62.85 X3.C2 | U2.31 v25,42 | U2.15 29,47.02 29.24,47.26 | 29.24,47.26 29.25,47.26 | U2.55 26,32.5 v25,33.5 | U2.72 34.5,32.5 v35,33 | 21,37 U2.41 v20.5,37 | 29.24,47.26 29.24,47.74 v29.5,48 | v16,42 15.5,41.5 15.5,40.5 v16,40 | U2.11 31,47.5 v31.5,48 | v54.5,29 52.5,29 v50,31.5 | 58.5,42.5 C29.1 59.5,42.5 60.5,43.5 v60.5,44.5 | v10,68 9.5,67.5 v9.5,65.5 7.65,63.65 C6.2 6.75,62 J1.5 | T8.2 38.96,68.96 v36,66 | v22,56 23,56 v25,54 | 34.6,17.6 v35,18 | v46.5,43 46.27,42.77 40.7,42.77 40.47,43 U2.97 36,43 v36,43.5 | U2.83 36.5,36 36,35.5 v36,34 | v41,48 39.5,48 v38.5,47 | T3.2 v16,60 | v40,30.5 v41,31.5 | C3.2 7.65,55.65 v6,54 | C21.- C25.2 C23.2 40.65,21.35 v41,21 | C24.2 48.35,26.2 C20.2 46.65,24.2 C22.2 48.35,21.65 v49,21 | R42.1 6.35,65.15 v6.5,65 | OK1.2 20.86,14.63 v21.5,14 21.5,12.5 21,12 20.37,12 OK1.4
  Bottom 0.254: C12.2 52.35,54.35 52,54 52,54.5 | R21.2 52.15,47.85 53.5,46.5 v53.5,47 | C26.2 28,50.15 28,51.5 28.5,51.5 28.5,51 | 31.75,54.31 31.58,54.47 | 29.96,54.47 29.79,54.31 | v35,18 32,18 31,17 v31,13 | v36,34 v35,33 | C5.1 39.85,49.15 v41,48 | U3.13 v46.5,43 46.75,42.75 | 46.75,42.75 U3.41 47.5,41.5 | U3.40 45.5,39.5 47.5,41.5 | U3.29 49,40 47.5,41.5 | 46.75,42.75 48.01,44.01 48.27,44.01 48.5,44.25 U3.17
  pour Bottom: 0.5,79.5 72.5,78.5 72.5,-0.5 0.5,0.5
GREEN
  Bottom 0.254: J4.2 20,76.83 20,75.2 21.2,74 29,74 30,73 R49.1
GYRO_INT  (via drill 0.35)
  Top 0.25: U1.12 35,13.5
  Top 0.254: 35,13.5 v35.5,13 | U2.53 25,29.64 26.9,27.74 26.9,26.1 v27,26
  Bottom 0.254: v35.5,13 35.5,12 35,11.5 31.64,11.5 31.2,11.94 30.37,11.94 28.81,13.5 28.81,19.34 28.6,19.55 28.6,25.4 28.23,25.77 27.23,25.77 v27,26
L+12V
  Top 0.254: OK1.6 25.14,13.37 24.5,14 24.5,15.5 24.91,15.9 OK1.8 26.75,15.9 R16.1 R7.2 27.22,12.07 27.22,10.48 27.42,10.29 X1.2 X1.1 28.51,4.23 29.54,5.26 30.39,5.26 31.41,4.23 X1.5 X1.7
LALI
  Top 0.254: X1.6 30.25,9.02 30.09,9.02 29.19,9.92 29.19,9.96 R7.1
LBLI
  Top 0.254: R16.2 28,16.09 29.6,14.49 29.6,10.09 30.26,9.42 32.39,9.42 X1.8
LDIR  (via drill 0.35)
  Top 0.254: U2.74 35.5,25 33.5,23 33.14,23 31.76,21.61 24.76,21.61 22.64,19.5 16,19.5 v15.5,19
  Bottom 0.254: v15.5,19 15.5,10.5 16.5,9.5 17.02,9.5 U$14.4A
LEA  (via drill 0.35)
  Top 0.254: Q3.3 53.15,15.5 R43.1 v54,19.5
  Bottom 0.254: X4.3 55,34 53.23,32.23 53.2,32.23 52.5,31.53 52.5,21 v54,19.5
  other vias: 58.7,34
LEA3  (via drill 0.35)
  Top 0.254: Q3.2 50.4,14.65 R39.1 48,13.65 v48,13.5 | U2.52 24.5,29.57 26.4,27.67 26.4,26.4 26,26 26,24.03 26.73,23.3 26.73,23.27 v27,23
  Bottom 0.254: v27,23 27,20.57 28.4,19.17 28.4,13.17 30.04,11.54 31.04,11.54 33.54,9.04 40.54,9.04 42.5,11 43.86,11 44,11.14 45.64,11.14 v48,13.5
LEB
  Top 0.254: R44.1 53.45,10.65 Q4.3 | R44.1 54,10.91 | 60,29 58.78,29 X4.5 55.5,25.71 55.5,11 55,10.5 54.15,10.5 R44.1
LEB3  (via drill 0.35)
  Top 0.254: U2.76 37.5,32.38 v37.5,30.5 | v38.5,28.5 38,28 38,18 38.6,17.4 45.67,17.4 46.68,16.39 46.68,11.32 47.5,10.5 48.85,10.5 R40.1 50.4,10.65 Q4.2
  Bottom 0.254: v37.5,30.5 38.5,29.5 v38.5,28.5
LED_LINK  (via drill 0.35)
  Top 0.254: U2.39 24,38 v24.5,38.5 | 54.65,43.12 | 54.65,43.12 53.73,42.2 53.73,39.2 53.3,38.77 52.7,38.77 52.27,39.2 52.27,40.73 49.5,43.5 47.03,43.5 46.8,43.73 46.2,43.73 45.97,43.5 v41,43.5 | 54.65,43.12 55.53,44 v58.5,44
  Bottom 0.254: v24.5,38.5 25,39 33.1,39 34.63,40.53 34.63,40.56 35.54,41.46 36.54,41.46 38.54,43.46 39.46,43.46 39.5,43.5 v41,43.5 | v58.5,44 58,43.5 U3.22
LED_SPEED  (via drill 0.35)
  Top 0.254: v55.5,45 59.25,45 59.25,43.75 58.78,43.28 57.69,43.28 57.52,43.12 57.52,43.09 57.5,43.06 57.5,41.75 55.93,40.18 55.92,40.18 55.75,40.01 55.75,38.75 v54.5,37.5 | U2.40 22.3,37.58 21.4,37.58 21.24,37.75 21.24,38.76 21,39 19,39 18.5,38.5 18.5,36 v18,35.5 | v18.5,33.5 18.5,32 20,30.5 v21,30.5
  Bottom 0.254: v55.5,45 54.5,44 U3.21 | v18,35.5 18,34 v18.5,33.5 | v21,30.5 22,30.5 22.5,31 29.14,31 29.81,31.66 | 29.81,31.66 | 29.81,31.66 31.57,33.43 32.42,33.43 32.85,33 32.85,32.73 33.23,32.35 35.65,32.35 37,31 37.08,31 37.23,31.15 37.85,31.15 39.75,29.25 41.22,29.25 42.2,28.27 45.27,28.27 v54.5,37.5
LGND  (via drill 0.35)
  Top 0.254: OK1.7 25.86,14.63 26.55,13.95 26.6,13.95 26.76,13.79 26.76,12.95 26.6,12.78 26.41,12.78 OK1.5 25.5,11.87 v25.5,5 | X1.10 X1.9
  Bottom 0.254: X1.9 37.58,4.08 36.5,3 26.5,3 25.5,4 v25.5,5
LPC_D+
  Top 0.254: J1.3 6.85,59.2 R1.1
LPC_D-
  Top 0.254: J1.2 7.1,58.55 R2.1
LSPEED  (via drill 0.35)
  Top 0.254: U2.75 36,24.93 33.67,22.6 33.31,22.6 31.93,21.21 24.93,21.21 22.86,19.14 | 22.86,19.14 22.81,19.1 | 22.86,19.14 22.81,19.1 | v16.5,18.5 17.1,19.1 22.81,19.1
  Bottom 0.254: U$14.6A 17.11,14.5 16.5,14.5 16,15 16,18 v16.5,18.5
N$1
  Top 0.254: OK1.1 19.91,15.9 18.5,14.5 17.65,14.5 R4.2
N$2  (via drill 0.35)
  Top 0.254: v32.5,51.5 29,51.5 28.5,51 U2.16
  Bottom 0.254: Y1.P$2 35.85,52.9 C4.2 35.59,50 34.81,50.78 33.22,50.78 v32.5,51.5
N$3  (via drill 0.35)
  Top 0.254: v34,53 33.29,53 33.02,52.72 29.65,52.72 28.1,51.17 28.1,48.6 27.5,48 U2.18
  Bottom 0.254: Y1.P$1 38.15,52.9 C5.2 37.29,50.86 37.29,53.25 36.37,54.18 35.13,54.18 34.97,54.02 34.97,53.97 v34,53
N$4
  Top 0.254: Q1.3 R3.1
N$6
  Top 0.254: OK2.1 4.75,15.9 R5.2
N$7
  Top 0.254: R10.2 4.01,13.37 OK2.3
N$9
  Top 0.254: OK1.3 18.02,13.37 R9.2
N$10
  Top 0.254: C7.2 26.15,49.15 25.5,48.5 U2.22
N$11  (via drill 0.35)
  Top 0.25: 42.37,33.06 40.43,35
  Top 0.254: v54.5,32 53.44,33.06 42.37,33.06 | 40.43,35 U2.81 | v59.5,51.5 59.5,53 60,53.5 61.5,53.5 62.5,52.5 62.5,49 66,45.5 66,45 v65.5,44.5
  Bottom 0.254: v54.5,32 54.5,31.5 55,31 65.5,31 66,31.5 66,44 v65.5,44.5 | R23.1 59.85,51.15 v59.5,51.5
N$13
  Top 0.2: U1.10 34.2,12.7
  Top 0.25: C2.1 31.15,11.65 32,12.5 34,12.5 34.2,12.7
N$14
  Bottom 0.254: R21.1 51.35,46 50.5,46 50,45.5 U3.20
N$15  (via drill 0.35)
  Top 0.25: 40.36,34.5 42.2,32.66
  Top 0.254: U2.80 40.36,34.5 | v53.5,31.5 52.34,32.66 42.2,32.66
  Bottom 0.254: R24.1 63.5,48 66.5,45 66.5,31 66,30.5 54.5,30.5 v53.5,31.5
N$16  (via drill 0.35)
  Top 0.254: R25.1 51,36 v50.5,36.5
  Bottom 0.254: v50.5,36.5 50,36.5 49.5,37 U3.32
N$24
  Top 0.254: T1.2 12,72.96 J5.1 J5.2
  Bottom 0.254: J5.1 12.15,75.65 R30.1
N$34
  Bottom 0.254: R27.2 R32.1 45.15,71.77 T2.1
N$36
  Bottom 0.254: R41.1 19.21,73 19.98,72.22 21.32,72.22 22.09,73 R36.2 24.96,70.39 T5.1
N$38
  Bottom 0.254: R49.2 31.87,72.98 R53.1 36.46,70.44 T8.1
N$40  (via drill 0.35)
  Top 0.254: R47.2 v44.15,63.35 | T9.1 38.5,65 40,65 40.5,65.5 v42.5,65.5
  Bottom 0.254: v42.5,65.5 43.5,65.5 44,65 44,63.5 v44.15,63.35
N$41
  Top 0.254: 15,58.19 14.96,58.15 | 14.96,58.15 14.96,55.77 15,55.73 15,54.5 15.5,54 R37.2 | 14.96,58.15 14.96,58.46 15.5,59 18.93,59 19.33,59.4 21.4,59.4 T6.1
N$42
  Top 0.254: R28.2 10.65,53.15 12,54.5 12,61.5 T3.1
N$43
  Top 0.254: T4.1 13.46,51.61 R29.2
N$44
  Top 0.254: T7.1 25.54,56.96 26,56.5 26,56 26.5,55.5 26.5,53.65 R38.2
N$45
  Top 0.254: T10.1 35.81,56.96 R48.2
N$46
  Bottom 0.254: D1.A 45.85,63.35 45.5,63 45.5,62.15 R26.2
N$47
  Bottom 0.254: R26.1 47.35,59.35 46.5,58.5 45.38,58.5 D2.A
N$48  (via drill 0.35)
  Top 0.254: v55.5,63 55.5,62 55,61.5 53.35,61.5 R34.2
  Bottom 0.254: D4.C 54.88,63.62 v55.5,63
N$49
  Bottom 0.25: D3.A R31.2
  Bottom 0.254: R31.2 49,61.59 48.22,60.81 48.22,59.48 48.38,59.32 51.31,59.32 52.38,60.38 52.38,60.73 Q2.1
N$50
  Top 0.254: R35.1 D5.A
N$51
  Bottom 0.254: Q2.3 51.4,63.55 R33.1 52.27,63.65 D4.A
N$54
  Bottom 0.254: R52.1 D6.A
NRESET  (via drill 0.35)
  Top 0.254: R6.1 15.85,23.35 C8.1 15.9,24.68 15.75,24.83 15.75,29.25 | 15.75,29.25 16.5,30 16.5,31.2 S1.1 | 15.75,29.25 14.25,29.25 v13,28 | v25.5,41 27.5,41 v28,41.5 | U2.17 v28,44
  Bottom 0.254: C16.1 R22.1 8.41,40 9.19,40.78 12.25,40.78 12.73,40.3 12.73,40.27 13,40 | 13,40 v13,28 11.5,26.5 8.35,26.5 J2.10 | 13,40 14,41 v25.5,41 | v28,41.5 v28,44
PFBOUT  (via drill 0.35)
  Top 0.254: v51.5,50 v49,50 | v53,39.5 53,40 53.32,40.32 53.32,42.37 54.48,43.52 54.48,44.98 v54.5,45
  Bottom 0.254: 51.75,50.25 52,50.5 C13.+ C12.1 | 51.75,50.25 v51.5,50 49.5,48 U3.19 | C28.1 55.65,46.65 | C28.1 55.35,46.65 51.75,50.25 | 48.5,50.5 48.23,50.23 48.23,48.7 48,48.47 U3.16 | C14.2 48.5,50.5 | v49,50 48.5,50.5 | v54.5,45 54.5,45.15 C28.1 | U3.30 v53,39.5
R+12V
  Top 0.254: OK2.8 11.4,15.9 11.5,16 | X2.7 X2.5 11,4 10,3 7.15,3 X2.1 X2.2 5.92,8.25 10.35,12.68 10.54,12.68 OK2.6 10.54,14.05 10.35,14.05 10.19,14.21 10.19,15.05 10.35,15.22 10.54,15.22 OK2.8 | OK2.8 12.82,17.5 15,17.5 15.5,17 15.5,15 15,14.5 14.15,14.5 R8.1 R17.1
RALI
  Top 0.254: R8.2 13.85,16.35 13,15.5 13,8.5 12.5,8 12.23,8 X2.6
RBLI
  Top 0.254: X2.8 13.54,10.69 R17.2
RD+  (via drill 0.35)
  Top 0.254: R13.1 42,50 v42.5,49.5 44.47,49.5 46.1,47.87 49.87,47.87 51.27,49.27 51.8,49.27 52.23,49.7 52.23,50.47 60.63,58.87 60.63,59.25 61.72,60.34 62.08,60.34 62.69,60.94 62.69,61.12 X3.4
  Bottom 0.254: v42.5,49.5 44,49.5 46,47.5 U3.12
RD-  (via drill 0.35)
  Top 0.254: R12.2 39.5,49.5 40,49 42,49 42.5,48.5 v44,48.5 45.03,47.47 50.04,47.47 51.44,48.87 51.97,48.87 51.99,48.89 52.99,48.89 | 53,48.88 52.99,48.89 | 52.99,48.89 61.9,57.8 62.08,57.8 62.69,58.4 62.69,58.58 X3.6
  Bottom 0.254: v44,48.5 45.5,47 U3.11
RDIR  (via drill 0.35)
  Top 0.254: U2.69 33,24 31.5,22.5 27.32,22.5 27.24,22.42 24.42,22.42 22.5,20.5 11.5,20.5 11,20 11,19 v11.5,18.5
  Bottom 0.254: v11.5,18.5 13,18.5 13.5,18 13.5,14 13,13.5 12.34,13.5 U$14.3A
REA
  Top 0.254: Q5.3 53.15,7.5 R54.1 58.05,8.35 X5.3
REA3  (via drill 0.35)
  Top 0.254: Q5.2 50.4,6.65 R50.1 48.85,6.5 v47,6.5 | U2.51 24,29.5 25.5,28 25.5,23.5 v26,23
  Bottom 0.254: v26,23 26,21 28,19 28,13 30,11 31,11 33.5,8.5 38.5,8.5 40.5,6.5 43.66,6.5 44,6.16 45,6.16 45.34,6.5 v47,6.5
REB
  Top 0.254: Q6.3 53.15,3 R55.1 57.44,2.15 58.7,3.42 X5.5
REB3
  Top 0.254: Q6.2 50.4,2.15 R51.1 47.35,2.15 46.5,3 46.5,5.97 46.27,6.2 46.27,16.23 45.5,17 38,17 37.5,17.5 37.5,29 39.5,31 39.5,32.5 39,33 U2.77
RED
  Bottom 0.254: R27.1 40.15,74.5 24.5,74.5 22.58,76.42 J4.3
RGND  (via drill 0.35)
  Top 0.254: X2.9 X2.10 | OK2.7 11.87,14.63 12.5,14 12.5,12.5 12,12 11.32,12 OK2.5 10,10.87 v10,10.5
  Bottom 0.254: X2.10 15.73,6.77 15,7.5 14.26,7.5 13.96,7.8 10.7,7.8 10,8.5 v10,10.5
RSPEED  (via drill 0.35)
  Top 0.254: U2.70 33.42,30.8 33.42,23.84 31.59,22.02 24.59,22.02 22.57,20 14.5,20 v14,19.5
  Bottom 0.254: v14,19.5 14,11.5 13.5,11 12.29,11 U$14.2A
RTCK  (via drill 0.35)
  Top 0.254: J2.7 7.05,30.28 8.77,30.28 11.99,33.5 v14,33.5 | U2.100 v36,44.5 | v33.5,41 34.6,39.9 34.6,37.2 34.37,36.97 34.37,35.5 34.02,35.15 33.73,35.15 33.54,34.96 | 33.4,34.82 33.54,34.96 | 33.54,34.96 33.54,34.93 33.37,34.76 33.37,34.24 33.5,34.11 v33.5,33
  Bottom 0.254: R11.1 4.15,27.38 J2.7 | v36,44.5 33.5,42 v33.5,41 | v14,33.5 14,33.03 14.73,32.3 14.73,32.27 15,32 16.97,32 17.2,31.77 17.33,31.77 17.51,31.6 29.17,31.6 29.4,31.83 | 29.4,31.83 | 29.4,31.83 31.54,33.96 32.54,33.96 v33.5,33
SCL  (via drill 0.35)
  Top 0.2: U1.23 33.4,18.9
  Top 0.254: 33.4,18.9 v33.5,19 | U2.58 27.5,29.98 27.25,29.74 27.24,29.74 27,29.5 27,28.5 27.5,28 27.5,27.5 27.77,27.23 28.3,27.23 28.73,26.8 28.73,26.77 29,26.5 29.5,26.5 v30,27
  Bottom 0.254: v30,27 29.5,26.5 29.5,20 30.5,19 v33.5,19
SDA  (via drill 0.35)
  Top 0.2: U1.24 33,17.5 32.5,18
  Top 0.254: 32.5,18 v30.5,18 | U2.59 v28,28.5
  Bottom 0.254: v30.5,18 29.71,18 29.21,18.5 29.21,19.5 29,19.71 29,27.5 v28,28.5
SLIGHT
  Top 0.254: T1.1 11.5,67 11.5,55 9.82,53.32 9.82,49.88 10,49.71 10,37.5 10.52,36.98 14.59,36.98 15.5,36.07 15.5,35 16.5,34 17,34 17.5,34.5 20,34.5 20.5,34 U2.47
TCLK  (via drill 0.35)
  Top 0.254: J2.4 7.45,34.04 6.23,35.26 4.76,35.26 3.5,34 3.5,21.5 5,20 7,20 v8,21 | 33.23,32.35 33.04,32.54 | 33.04,32.54 32.85,32.73 32.85,34.95 33.46,35.56 33.85,35.56 33.9,35.6 33.9,37.07 34.19,37.36 34.19,39.74 33.96,39.96 33.61,39.96 32.85,40.73 32.85,41.27 33.23,41.65 33.65,41.65 34,42 U2.5 | v39,6.75 39,15 36.42,17.58 36.42,32.4 35.37,33.45 35.37,33.63 34.74,33.63 34.37,33.26 34.37,32.97 33.76,32.37 33.24,32.37 33.07,32.54 33.04,32.54
  Bottom 0.254: R19.1 8,23.35 v8,21 17.18,21 17.26,20.92 17.74,20.92 17.82,21 25.43,21 27.46,18.96 27.46,12.96 29.83,10.6 30.72,10.6 33.22,8.1 35.9,8.1 36.5,7.5 36.5,6 37,5.5 38.5,5.5 39,6 v39,6.75
TD+  (via drill 0.35)
  Top 0.254: v47.5,49 47,49.5 R15.1 47,50.91 50.77,54.68 50.77,56.3 51.2,56.73 51.94,56.73 X3.1
  Bottom 0.254: U3.15 v47.5,49
TD-  (via drill 0.35)
  Top 0.254: R14.2 44.5,50.5 45.5,49.5 v46,49.5 46.77,48.73 46.77,48.7 47.2,48.27 47.8,48.27 48.23,48.7 48.23,50.44 55.83,58.04 57.26,58.04 57.87,58.65 57.87,60.12 X3.3
  Bottom 0.254: v46,49.5 46.77,48.73 46.77,48.7 47,48.47 U3.14
TDI  (via drill 0.35)
  Top 0.254: U2.2 35.5,50 34.5,51 34.67,51.17 34.67,51.49 35.01,51.83 35.08,51.83 35.25,52 38.25,52 38.75,51.5 v43.5,51.5
  Bottom 0.254: R20.2 4.41,40 5.18,39.22 6.75,39.22 | 6.75,39.22 9.28,39.22 10,38.5 10,29.5 9.5,29 8.31,29 J2.8 | 6.75,39.22 6.75,46.25 1.75,51.25 1.75,71.75 3,73 7.5,73 8,72.5 8,69.75 7.75,69.5 7.75,66.75 44,66.75 44.5,66.25 44.5,63.82 44.73,63.59 44.73,61.41 44.24,60.92 43.5,60.92 43.1,60.53 43.1,59.47 44.5,58.08 45.24,58.08 45.58,57.74 45.58,53.71 45.17,53.3 45.14,53.3 43.5,51.66 v43.5,51.5
TDO  (via drill 0.35)
  Top 0.254: v4.5,47.5 8,47.5 v8.5,48 | U2.1 36,51.25 v35.25,51.25
  Bottom 0.254: J2.6 7.45,31.5 6.23,32.72 1.78,32.72 1.5,33 1.5,44.5 v4.5,47.5 | 31.04,60.71 31,60.75 30.93,60.68 | 31.04,60.71 33.5,58.25 33.5,53.39 33.37,53.26 33.37,52.74 33.74,52.37 34.13,52.37 v35.25,51.25 | v8.5,48 9.5,48 10,48.5 10,54.15 9.78,54.37 9.74,54.37 9.37,54.74 9.37,55.26 9.74,55.63 9.97,55.63 12.42,58.08 12.42,58.15 13.03,58.76 13.1,58.76 15.02,60.68 15.68,60.68 15.71,60.71 31.04,60.71
TGT_P1.0  (via drill 0.35)
  Top 0.254: U2.95 v41.5,42
  Bottom 0.254: v41.5,42 42,42 43,41 U3.4 45,41
TGT_P1.1  (via drill 0.35)
  Top 0.254: U2.94 40.97,41.5 41.2,41.27 42.77,41.27 v43.5,42
  Bottom 0.254: v43.5,42 44,41.5 U3.5
TGT_P1.4  (via drill 0.35)
  Top 0.254: v40.5,40 40,40 39,41 U2.93
  Bottom 0.254: v40.5,40 41.5,40 42,40.5 U3.3
TGT_P1.8  (via drill 0.35)
  Top 0.254: v51.5,38 50.23,39.27 40.16,39.27 38.93,40.5 U2.92
  Bottom 0.254: v51.5,38 51.5,35.5 51,35 49.5,35 49,35.5 U3.33
TGT_P1.9  (via drill 0.35)
  Top 0.254: v43.5,38 42.63,38.87 39.99,38.87 38.86,40 U2.91
  Bottom 0.254: v43.5,38 43.5,35.5 44,35 46.97,35 47.5,35.53 U3.36
TGT_P1.10  (via drill 0.35)
  Top 0.254: v44.5,37 44.23,37.27 43.2,37.27 42.77,37.7 42.77,37.73 42.03,38.47 39.82,38.47 38.79,39.5 U2.90
  Bottom 0.254: v44.5,37 46.5,37 47,37.5 U3.37
TGT_P1.14  (via drill 0.35)
  Top 0.254: v48,35 46.73,36.27 44.2,36.27 43.97,36.5 43,36.5 41.44,38.06 39.65,38.06 38.72,39 U2.89
  Bottom 0.254: v48,35 48.5,35.5 U3.34
TGT_P1.16  (via drill 0.35)
  Top 0.2: U2.87 38.69,38 39.35,37.33 41.14,37.33 42.93,35.55 46.4,35.55 46.95,35 46.95,34.42 47.5,33.87 51.54,33.87
  Top 0.254: v62,41.5 62.5,41 62.5,36.5 62.05,36.05 62.05,36 61.27,35.22 52.89,35.22 51.54,33.87
  Bottom 0.254: U3.25 57,42 57.5,41.5 v62,41.5
TGT_P1.17  (via drill 0.35)
  Top 0.2: 41,35 38.5,37.5 U2.86
  Top 0.254: v61.5,43.5 62,43.5 62.9,42.6 62.9,35.1 63,35 61.65,33.65 61.65,33.06 61.49,32.9 55.92,32.9 54.82,34 52.24,34 51.71,33.47 42.53,33.47 41,35 40.83,35.17 40.83,35.18
  Bottom 0.254: v61.5,43.5 60.5,43.5 59.5,42.5 U3.24
TGT_RXD  (via drill 0.35)
  Top 0.254: U2.99 38.5,44 38.58,44.08 38.6,44.08 41.58,47.06 50.2,47.06 51.61,48.47 53.15,48.47 55.19,50.5 60.57,50.5 62,49.07 62,45.57 65.04,42.54 67.01,42.54 67.2,42.73 67.8,42.73 68.23,42.3 68.23,41.7 68,41.47 68,39 68.5,38.5 v68.5,38
  Bottom 0.254: v68.5,38 68.5,37.5 68,37 68,18.43 60.3,10.73 45.31,10.73 J3.TXO
TGT_SCON  (via drill 0.35)
  Top 0.254: Q1.1 11,45.05 v11,38.5 | v28,26.5 29,25.5 30,25.5 30.73,26.23 30.73,27.3 30.5,27.53 U2.64 | v15,30.5 13.34,30.5 13.09,30.25 12.76,30.25 11.5,29 v11.5,28
  Bottom 0.254: v11,38.5 12.5,37 12.5,32.5 12,32 12,28.5 v11.5,28 | v15,30.5 16,29.5 16,25 19,22 23.5,22 24.94,23.44 24.94,24.02 26.35,25.42 26.35,26.27 26.73,26.65 27.27,26.65 27.42,26.5 v28,26.5
TGT_TXD  (via drill 0.35)
  Top 0.15: 51.75,48 51.71,48
  Top 0.254: U2.98 38.5,43.5 38.58,43.58 38.67,43.58 41.74,46.66 50.37,46.66 51.61,47.89 | 51.61,47.89 51.71,48 | J3.RXI 44.5,12.5 v42.5,14.5 | v67.5,42 65,42 61.5,45.5 61.5,49 60.5,50 55.26,50 53.32,48.06 51.77,48.06 51.61,47.89
  Bottom 0.254: v42.5,14.5 42.5,16 43.5,17 66,17 67.5,18.5 v67.5,42
TMS  (via drill 0.35)
  Top 0.254: J2.2 14.42,36.58 15,36 15,33 15.5,32.5 v17.5,32.5 | U2.3 35,37.03 34.77,36.8 34.77,35.27 v34,34.5
  Bottom 0.254: R18.1 4.15,41.44 3.32,40.62 3.32,39.18 4.5,38 8,38 8.5,37.5 8.5,36.81 J2.2 | 17.82,32.18 v17.5,32.5 17.91,32.09 arc45 18.12,32 29,32 31.41,34.41 arc-45 31.62,34.5 v34,34.5
USB_D+  (via drill 0.35)
  Top 0.254: v10,55 9.35,55.65 C3.1 8.69,56.66 8.69,57.22 8.52,57.38 8.52,58.62 8.69,58.78 8.71,58.78 9.35,59.41 R1.2 | v15.5,50 16.16,50 19.38,46.78 19.38,46.47 R3.2 19.85,45.35 19.5,45 19.5,44 20.5,43 U2.29
  Bottom 0.254: v15.5,50 15,50.5 15,54.5 14.5,55 v10,55
USB_D-  (via drill 0.35)
  Top 0.254: U2.30 22.3,42.58 20.34,42.58 18.98,43.95 18.98,46.62 18.82,46.78 17.72,46.78 14.5,50 14.5,59 13.5,60 v13,60 | R2.2 10.5,59.15 v10.5,60 | C6.1 10,62 v10.5,61.5
  Bottom 0.254: 11,60 v10.5,60 | 11,60 v13,60 | v10.5,61.5 10.5,60.5 11,60
VCC
  Top 0.254: X5.4 64.96,6.46 66.5,8 66.5,25.01 61.49,30.02 60.14,30.02 X4.4
VDDA  (via drill 0.35)
  Top 0.15: 31,44.5 31,38 v31.25,38
  Top 0.25: 45.5,28.75 42.96,28.75 arc-45 42.6,28.9 v42.5,29
  Top 0.254: C20.1 48.5,24.5 50,26 50,28 49.5,28.5 45.75,28.5 | 45.75,28.5 45.5,28.75 | U2.12 30.5,45 31,44.5 31.5,45 U2.10 | L1.1 44.5,27.25 45.75,28.5
  Bottom 0.2: v31.25,38 38.75,38
  Bottom 0.25: 38.75,38 38.75,32.96
  Bottom 0.254: 38.75,32.96 38.75,32.75 v42.5,29